# Altium PCB F407.PcbDoc (part 7 of 12)
Units mil, origin at the board's own origin, x right, y up, seen from the top; angles counter-clockwise.
Board outline 6062.25 x 4305.79 mil, 2 copper layers (Top Layer, Bottom Layer); 68 components, 138 nets, 423 pads, 108 vias.
Unrouted connection lines stored in the file: 2.
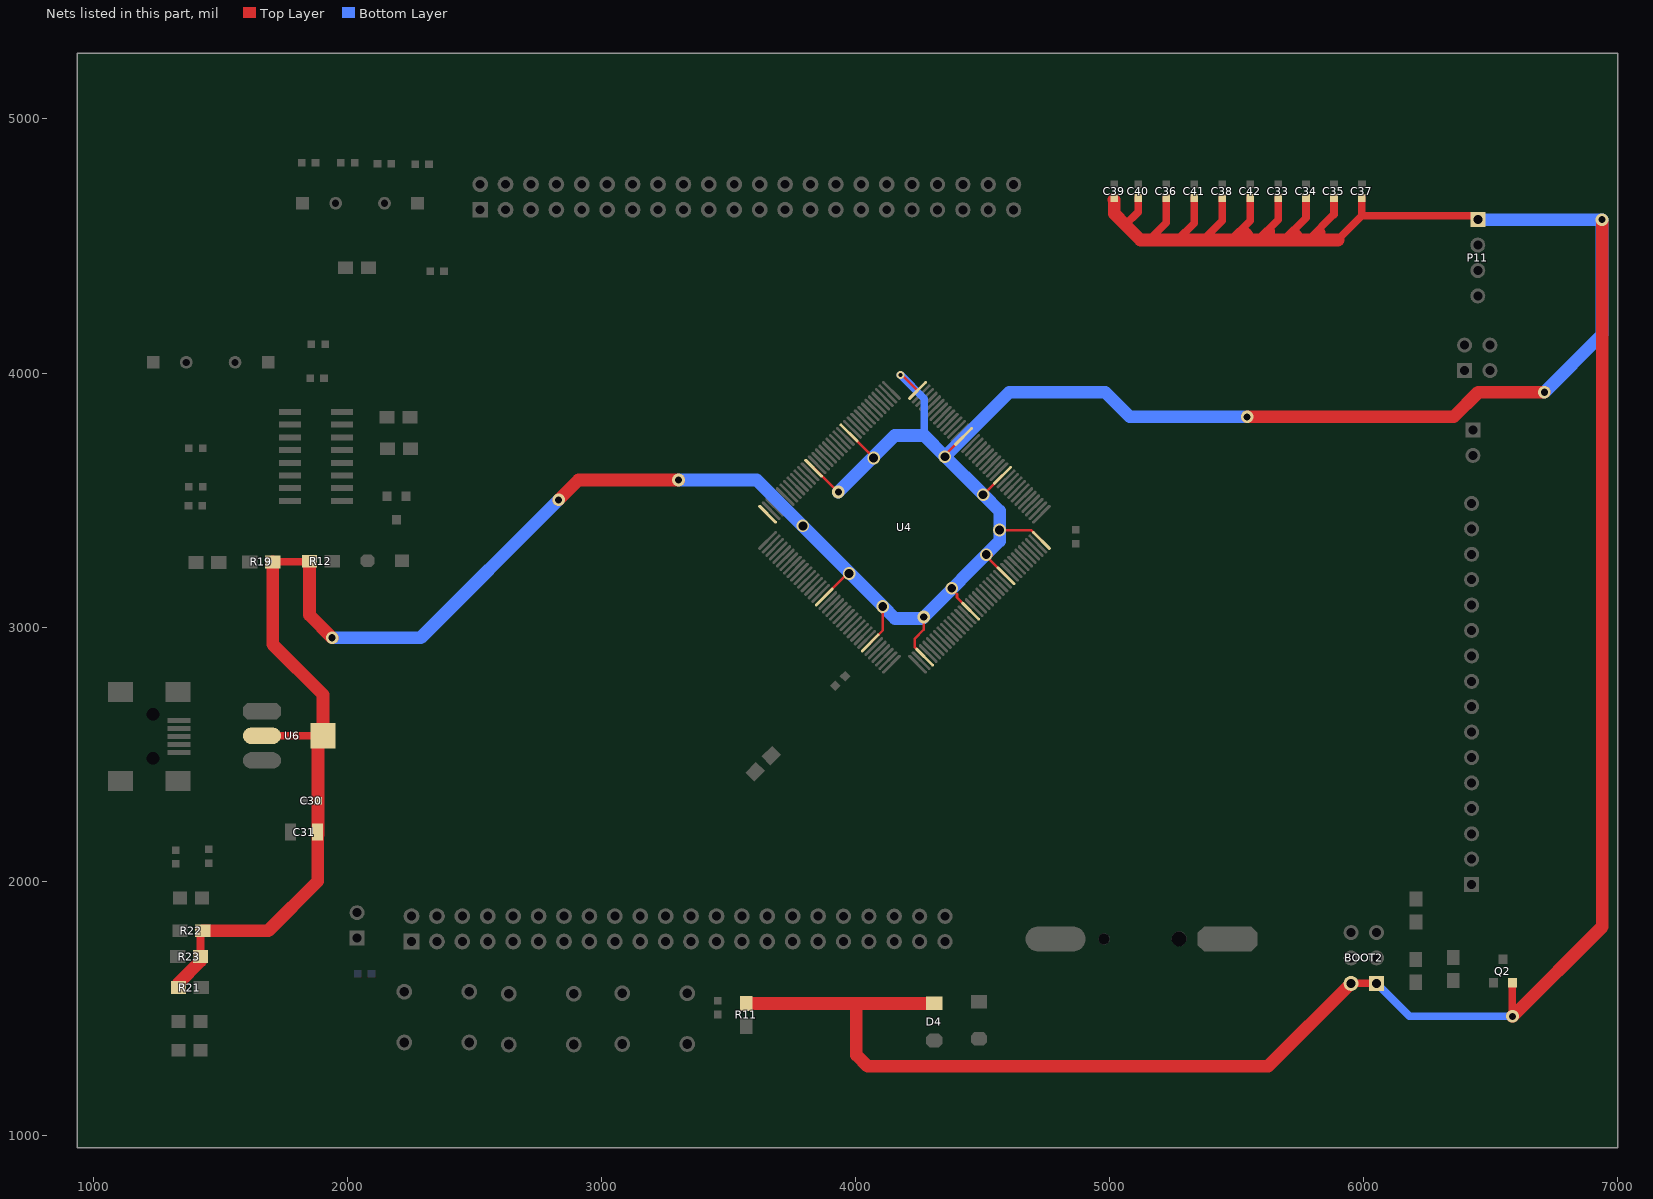
[diagram p7: the nets of this part, all layers, seen from the top]

## Via types
v1: diameter 30, hole 15, Top Layer to Bottom Layer, 48 vias
v2: diameter 50, hole 28, Top Layer to Bottom Layer, 42 vias
v3: diameter 50, hole 35, Top Layer to Bottom Layer, 9 vias
v4: diameter 20, hole 10, Top Layer to Bottom Layer, 8 vias
v5: diameter 50, hole 30, Top Layer to Bottom Layer, 1 vias

## Nets (pads, with @x,y where several pads share a name; then routed paths per layer and width w, separated by ;. In a path a pad name is that pad's centre, name@x,y a point inside that pad or via, vN(x,y) a via of type N, cw(c..) or ccw(c..) an arc to the next point about the centre after c; other vN are vias at no path point) (continued)
VCC3.3: (continued)
  Top Layer w30: 5524.47,4551.79 cw(c5502.27,4529.59) 5533.19,4524.18 ; 5524.47,4551.79 cw(c5502.27,4529.59) 5533.19,4524.18 ; 5524.47,4551.79 cw(c5502.27,4529.59) 5533.19,4524.18 ; 5524.47,4551.79 cw(c5502.27,4529.59) 5533.19,4524.18 ; 5524.47,4551.79 cw(c5502.27,4529.59) 5533.19,4524.18 ; 5524.47,4551.79 cw(c5502.27,4529.59) 5533.19,4524.18 ; 5524.47,4551.79 cw(c5502.27,4529.59) 5533.19,4524.18 ; 5524.47,4551.79 cw(c5502.27,4529.59) 5533.19,4524.18 ; 5524.47,4551.79 cw(c5502.27,4529.59) 5533.19,4524.18 ; 5524.47,4551.79 cw(c5502.27,4529.59) 5533.19,4524.18 ; 5524.47,4551.79 cw(c5502.27,4529.59) 5533.19,4524.18 ; 5524.47,4551.79 cw(c5502.27,4529.59) 5533.19,4524.18 ; 5524.47,4551.79 cw(c5502.27,4529.59) 5533.19,4524.18 ; 5524.47,4551.79 cw(c5502.27,4529.59) 5533.19,4524.18 ; 5524.47,4551.79 cw(c5502.27,4529.59) 5533.19,4524.18 ; 5524.47,4551.79 cw(c5502.27,4529.59) 5533.19,4524.18 ; 5524.47,4551.79 cw(c5502.27,4529.59) 5533.19,4524.18 ; 5524.47,4551.79 cw(c5502.27,4529.59) 5533.19,4524.18 ; 5524.47,4551.79 cw(c5502.27,4529.59) 5533.19,4524.18 ; 5524.47,4551.79 cw(c5502.27,4529.59) 5533.19,4524.18 ; 5524.47,4551.79 cw(c5502.27,4529.59) 5533.19,4524.18 ; 5524.47,4551.79 cw(c5502.27,4529.59) 5533.19,4524.18 ; 5524.47,4551.79 cw(c5502.27,4529.59) 5533.19,4524.18 ; 5524.47,4551.79 cw(c5502.27,4529.59) 5533.19,4524.18 ; 5524.47,4551.79 cw(c5502.27,4529.59) 5533.19,4524.18 ; 5524.47,4551.79 cw(c5502.27,4529.59) 5533.19,4524.18 ; 5524.47,4551.79 cw(c5502.27,4529.59) 5533.19,4524.18 ; 5524.47,4551.79 cw(c5502.27,4529.59) 5533.19,4524.18 ; 5524.47,4551.79 cw(c5502.27,4529.59) 5533.19,4524.18 ; 5524.47,4551.79 cw(c5502.27,4529.59) 5533.19,4524.18 ; 5524.47,4551.79 cw(c5502.27,4529.59) 5533.19,4524.18 ; 5524.47,4551.79 cw(c5502.27,4529.59) 5533.19,4524.18 ; 5524.47,4551.79 cw(c5502.27,4529.59) 5533.19,4524.18 ; 5524.47,4551.79 cw(c5502.27,4529.59) 5533.19,4524.18 ; 5524.47,4551.79 cw(c5502.27,4529.59) 5533.19,4524.18 ; 5524.47,4551.79 cw(c5502.27,4529.59) 5533.19,4524.18 ; 5524.47,4551.79 cw(c5502.27,4529.59) 5533.19,4524.18 ; 5524.47,4551.79 cw(c5502.27,4529.59) 5533.19,4524.18 ; 5524.47,4551.79 cw(c5502.27,4529.59) 5533.19,4524.18 ; 5524.47,4551.79 cw(c5502.27,4529.59) 5533.19,4524.18 ; 5524.47,4551.79 cw(c5502.27,4529.59) 5533.19,4524.18 ; 5524.47,4551.79 cw(c5502.27,4529.59) 5533.19,4524.18 ; 5524.47,4551.79 cw(c5502.27,4529.59) 5533.19,4524.18 ; 5524.47,4551.79 cw(c5502.27,4529.59) 5533.19,4524.18 ; 5524.47,4551.79 cw(c5502.27,4529.59) 5533.19,4524.18 ; 5524.47,4551.79 cw(c5502.27,4529.59) 5533.19,4524.18 ; 5524.47,4551.79 cw(c5502.27,4529.59) 5533.19,4524.18 ; 5524.47,4551.79 cw(c5502.27,4529.59) 5533.19,4524.18 ; 5524.47,4551.79 cw(c5502.27,4529.59) 5533.19,4524.18 ; 5524.47,4551.79 cw(c5502.27,4529.59) 5533.19,4524.18 ; 5524.47,4551.79 cw(c5502.27,4529.59) 5533.19,4524.18 ; 5524.47,4551.79 cw(c5502.27,4529.59) 5533.19,4524.18 ; 5524.47,4551.79 cw(c5502.27,4529.59) 5533.19,4524.18 ; 5524.47,4551.79 cw(c5502.27,4529.59) 5533.19,4524.18 ; 5524.47,4551.79 cw(c5502.27,4529.59) 5533.19,4524.18 ; 5524.47,4551.79 cw(c5502.27,4529.59) 5533.19,4524.18 ; 5524.47,4551.79 cw(c5502.27,4529.59) 5533.19,4524.18 ; 5524.47,4551.79 cw(c5502.27,4529.59) 5533.19,4524.18 ; 5524.47,4551.79 cw(c5502.27,4529.59) 5533.19,4524.18 ; 5524.47,4551.79 cw(c5502.27,4529.59) 5533.19,4524.18 ; 5524.47,4551.79 cw(c5502.27,4529.59) 5533.19,4524.18 ; 5524.47,4551.79 cw(c5502.27,4529.59) 5533.19,4524.18 ; 5524.47,4551.79 cw(c5502.27,4529.59) 5533.19,4524.18 ; 5524.47,4551.79 cw(c5502.27,4529.59) 5533.19,4524.18 ; 5524.47,4551.79 cw(c5502.27,4529.59) 5533.19,4524.18 ; 5524.47,4551.79 cw(c5502.27,4529.59) 5533.19,4524.18 ; 5524.47,4551.79 cw(c5502.27,4529.59) 5533.19,4524.18 ; 5524.47,4551.79 cw(c5502.27,4529.59) 5533.19,4524.18 ; 5524.47,4551.79 cw(c5502.27,4529.59) 5533.19,4524.18 ; 5524.47,4551.79 cw(c5502.27,4529.59) 5533.19,4524.18 ; 5524.47,4551.79 cw(c5502.27,4529.59) 5533.19,4524.18 ; 5524.47,4551.79 cw(c5502.27,4529.59) 5533.19,4524.18 ; 5524.47,4551.79 cw(c5502.27,4529.59) 5533.19,4524.18 ; 5524.47,4551.79 cw(c5502.27,4529.59) 5533.19,4524.18 ; 5524.47,4551.79 cw(c5502.27,4529.59) 5533.19,4524.18 ; 5524.47,4551.79 cw(c5502.27,4529.59) 5533.19,4524.18 ; 5524.47,4551.79 cw(c5502.27,4529.59) 5533.19,4524.18 ; 5524.47,4551.79 cw(c5502.27,4529.59) 5533.19,4524.18 ; 5524.47,4551.79 cw(c5502.27,4529.59) 5533.19,4524.18 ; 5524.47,4551.79 cw(c5502.27,4529.59) 5533.19,4524.18 ; 5524.47,4551.79 cw(c5502.27,4529.59) 5533.19,4524.18 ; 5524.47,4551.79 cw(c5502.27,4529.59) 5533.19,4524.18 ; 5524.47,4551.79 cw(c5502.27,4529.59) 5533.19,4524.18 ; 5524.47,4551.79 cw(c5502.27,4529.59) 5533.19,4524.18 ; 5524.47,4551.79 cw(c5502.27,4529.59) 5533.19,4524.18 ; 5524.47,4551.79 cw(c5502.27,4529.59) 5533.19,4524.18 ; 5524.47,4551.79 cw(c5502.27,4529.59) 5533.19,4524.18 ; 5524.47,4551.79 cw(c5502.27,4529.59) 5533.19,4524.18 ; 5524.47,4551.79 cw(c5502.27,4529.59) 5533.19,4524.18 ; 5524.47,4551.79 cw(c5502.27,4529.59) 5533.19,4524.18 ; 5524.47,4551.79 cw(c5502.27,4529.59) 5533.19,4524.18 ; 5524.47,4551.79 cw(c5502.27,4529.59) 5533.19,4524.18 ; 5524.47,4551.79 cw(c5502.27,4529.59) 5533.19,4524.18 ; 5524.47,4551.79 cw(c5502.27,4529.59) 5533.19,4524.18 ; 5524.47,4551.79 cw(c5502.27,4529.59) 5533.19,4524.18 ; 5524.47,4551.79 cw(c5502.27,4529.59) 5533.19,4524.18 ; 5524.47,4551.79 cw(c5502.27,4529.59) 5533.19,4524.18 ; 5524.47,4551.79 cw(c5502.27,4529.59) 5533.19,4524.18 ; 5524.47,4551.79 cw(c5502.27,4529.59) 5533.19,4524.18 ; 5524.47,4551.79 cw(c5502.27,4529.59) 5533.19,4524.18 ; 5524.47,4551.79 cw(c5502.27,4529.59) 5533.19,4524.18 ; 5524.47,4551.79 cw(c5502.27,4529.59) 5533.19,4524.18 ; 5524.47,4551.79 cw(c5502.27,4529.59) 5533.19,4524.18 ; 5524.47,4551.79 cw(c5502.27,4529.59) 5533.19,4524.18 ; 5524.47,4551.79 cw(c5502.27,4529.59) 5533.19,4524.18 ; 5524.47,4551.79 cw(c5502.27,4529.59) 5533.19,4524.18 ; 5524.47,4551.79 cw(c5502.27,4529.59) 5533.19,4524.18 ; 5524.47,4551.79 cw(c5502.27,4529.59) 5533.19,4524.18 ; 5524.47,4551.79 cw(c5502.27,4529.59) 5533.19,4524.18 ; 5524.47,4551.79 cw(c5502.27,4529.59) 5533.19,4524.18 ; 5524.47,4551.79 cw(c5502.27,4529.59) 5533.19,4524.18 ; 5524.47,4551.79 cw(c5502.27,4529.59) 5533.19,4524.18 ; 5524.47,4551.79 cw(c5502.27,4529.59) 5533.19,4524.18 ; 5524.47,4551.79 cw(c5502.27,4529.59) 5533.19,4524.18 ; 5524.47,4551.79 cw(c5502.27,4529.59) 5533.19,4524.18 ; 5524.47,4551.79 cw(c5502.27,4529.59) 5533.19,4524.18 ; 5524.47,4551.79 cw(c5502.27,4529.59) 5533.19,4524.18 ; 5524.47,4551.79 cw(c5502.27,4529.59) 5533.19,4524.18 ; 5524.47,4551.79 cw(c5502.27,4529.59) 5533.19,4524.18 ; 5524.47,4551.79 cw(c5502.27,4529.59) 5533.19,4524.18 ; 5524.47,4551.79 cw(c5502.27,4529.59) 5533.19,4524.18 ; 5524.47,4551.79 cw(c5502.27,4529.59) 5533.19,4524.18 ; 5524.47,4551.79 cw(c5502.27,4529.59) 5533.19,4524.18 ; 5524.47,4551.79 cw(c5502.27,4529.59) 5533.19,4524.18 ; 5524.47,4551.79 cw(c5502.27,4529.59) 5533.19,4524.18 ; 5524.47,4551.79 cw(c5502.27,4529.59) 5533.19,4524.18 ; 5524.47,4551.79 cw(c5502.27,4529.59) 5533.19,4524.18 ; 5524.47,4551.79 cw(c5502.27,4529.59) 5533.19,4524.18 ; 5524.47,4551.79 cw(c5502.27,4529.59) 5533.19,4524.18 ; 5524.47,4551.79 cw(c5502.27,4529.59) 5533.19,4524.18 ; 5524.47,4551.79 cw(c5502.27,4529.59) 5533.19,4524.18 ; 5524.47,4551.79 cw(c5502.27,4529.59) 5533.19,4524.18 ; 5524.47,4551.79 cw(c5502.27,4529.59) 5533.19,4524.18 ; 5524.47,4551.79 cw(c5502.27,4529.59) 5533.19,4524.18 ; 5524.47,4551.79 cw(c5502.27,4529.59) 5533.19,4524.18 ; 5524.47,4551.79 cw(c5502.27,4529.59) 5533.19,4524.18 ; 5524.47,4551.79 cw(c5502.27,4529.59) 5533.19,4524.18 ; 5524.47,4551.79 cw(c5502.27,4529.59) 5533.19,4524.18 ; 5524.47,4551.79 cw(c5502.27,4529.59) 5533.19,4524.18 ; 5524.47,4551.79 cw(c5502.27,4529.59) 5533.19,4524.18 ; 5524.47,4551.79 cw(c5502.27,4529.59) 5533.19,4524.18 ; 5524.47,4551.79 cw(c5502.27,4529.59) 5533.19,4524.18 ; 5524.47,4551.79 cw(c5502.27,4529.59) 5533.19,4524.18 ; 5524.47,4551.79 cw(c5502.27,4529.59) 5533.19,4524.18 ; 5524.47,4551.79 cw(c5502.27,4529.59) 5533.19,4524.18 ; 5524.47,4551.79 cw(c5502.27,4529.59) 5533.19,4524.18 ; 5524.47,4551.79 cw(c5502.27,4529.59) 5533.19,4524.18 ; 5524.47,4551.79 cw(c5502.27,4529.59) 5533.19,4524.18 ; 5524.47,4551.79 cw(c5502.27,4529.59) 5533.19,4524.18 ; 5524.47,4551.79 cw(c5502.27,4529.59) 5533.19,4524.18 ; 5524.47,4551.79 cw(c5502.27,4529.59) 5533.19,4524.18 ; 5524.47,4551.79 cw(c5502.27,4529.59) 5533.19,4524.18 ; 5524.47,4551.79 cw(c5502.27,4529.59) 5533.19,4524.18 ; 5524.47,4551.79 cw(c5502.27,4529.59) 5533.19,4524.18 ; 5524.47,4551.79 cw(c5502.27,4529.59) 5533.19,4524.18 ; 5524.47,4551.79 cw(c5502.27,4529.59) 5533.19,4524.18 ; 5524.47,4551.79 cw(c5502.27,4529.59) 5533.19,4524.18 ; 5524.47,4551.79 cw(c5502.27,4529.59) 5533.19,4524.18 ; 5524.47,4551.79 cw(c5502.27,4529.59) 5533.19,4524.18 ; 5524.47,4551.79 cw(c5502.27,4529.59) 5533.19,4524.18 ; 5524.47,4551.79 cw(c5502.27,4529.59) 5533.19,4524.18 ; 5524.47,4551.79 cw(c5502.27,4529.59) 5533.19,4524.18 ; 5524.47,4551.79 cw(c5502.27,4529.59) 5533.19,4524.18 ; 5524.47,4551.79 cw(c5502.27,4529.59) 5533.19,4524.18 ; 5524.47,4551.79 cw(c5502.27,4529.59) 5533.19,4524.18 ; 5524.47,4551.79 cw(c5502.27,4529.59) 5533.19,4524.18 ; 5524.47,4551.79 cw(c5502.27,4529.59) 5533.19,4524.18 ; 5524.47,4551.79 cw(c5502.27,4529.59) 5533.19,4524.18 ; 5524.47,4551.79 cw(c5502.27,4529.59) 5533.19,4524.18 ; 5524.47,4551.79 cw(c5502.27,4529.59) 5533.19,4524.18 ; 5524.47,4551.79 cw(c5502.27,4529.59) 5533.19,4524.18 ; 5524.47,4551.79 cw(c5502.27,4529.59) 5533.19,4524.18 ; 5524.47,4551.79 cw(c5502.27,4529.59) 5533.19,4524.18 ; 5524.47,4551.79 cw(c5502.27,4529.59) 5533.19,4524.18 ; 5524.47,4551.79 cw(c5502.27,4529.59) 5533.19,4524.18 ; 5524.47,4551.79 cw(c5502.27,4529.59) 5533.19,4524.18 ; 5524.47,4551.79 cw(c5502.27,4529.59) 5533.19,4524.18 ; 5524.47,4551.79 cw(c5502.27,4529.59) 5533.19,4524.18 ; 5524.47,4551.79 cw(c5502.27,4529.59) 5533.19,4524.18 ; 5524.47,4551.79 cw(c5502.27,4529.59) 5533.19,4524.18 ; 5524.47,4551.79 cw(c5502.27,4529.59) 5533.19,4524.18 ; 5524.47,4551.79 cw(c5502.27,4529.59) 5533.19,4524.18 ; 5524.47,4551.79 cw(c5502.27,4529.59) 5533.19,4524.18 ; 5524.47,4551.79 cw(c5502.27,4529.59) 5533.19,4524.18 ; 5524.47,4551.79 cw(c5502.27,4529.59) 5533.19,4524.18 ; 5524.47,4551.79 cw(c5502.27,4529.59) 5533.19,4524.18 ; 5524.47,4551.79 cw(c5502.27,4529.59) 5533.19,4524.18 ; 5524.47,4551.79 cw(c5502.27,4529.59) 5533.19,4524.18 ; 5524.47,4551.79 cw(c5502.27,4529.59) 5533.19,4524.18 ; 5524.47,4551.79 cw(c5502.27,4529.59) 5533.19,4524.18 ; 5524.47,4551.79 cw(c5502.27,4529.59) 5533.19,4524.18 ; 5524.47,4551.79 cw(c5502.27,4529.59) 5533.19,4524.18 ; 5524.47,4551.79 cw(c5502.27,4529.59) 5533.19,4524.18 ; 5524.47,4551.79 cw(c5502.27,4529.59) 5533.19,4524.18 ; 5524.47,4551.79 cw(c5502.27,4529.59) 5533.19,4524.18 ; 5524.47,4551.79 cw(c5502.27,4529.59) 5533.19,4524.18 ; 5524.47,4551.79 cw(c5502.27,4529.59) 5533.19,4524.18 ; 5524.47,4551.79 cw(c5502.27,4529.59) 5533.19,4524.18 ; 5524.47,4551.79 cw(c5502.27,4529.59) 5533.19,4524.18 ; 5524.47,4551.79 cw(c5502.27,4529.59) 5533.19,4524.18 ; 5524.47,4551.79 cw(c5502.27,4529.59) 5533.19,4524.18 ; 5524.47,4551.79 cw(c5502.27,4529.59) 5533.19,4524.18 ; 5524.47,4551.79 cw(c5502.27,4529.59) 5533.19,4524.18 ; 5524.47,4551.79 cw(c5502.27,4529.59) 5533.19,4524.18 ; 5524.47,4551.79 cw(c5502.27,4529.59) 5533.19,4524.18 ; 5524.47,4551.79 cw(c5502.27,4529.59) 5533.19,4524.18 ; 5524.47,4551.79 cw(c5502.27,4529.59) 5533.19,4524.18 ; 5524.47,4551.79 cw(c5502.27,4529.59) 5533.19,4524.18 ; 5524.47,4551.79 cw(c5502.27,4529.59) 5533.19,4524.18 ; 5524.47,4551.79 cw(c5502.27,4529.59) 5533.19,4524.18 ; 5524.47,4551.79 cw(c5502.27,4529.59) 5533.19,4524.18 ; 5524.47,4551.79 cw(c5502.27,4529.59) 5533.19,4524.18 ; 5524.47,4551.79 cw(c5502.27,4529.59) 5533.19,4524.18 ; 5524.47,4551.79 cw(c5502.27,4529.59) 5533.19,4524.18 ; 5524.47,4551.79 cw(c5502.27,4529.59) 5533.19,4524.18 ; 5524.47,4551.79 cw(c5502.27,4529.59) 5533.19,4524.18 ; 5524.47,4551.79 cw(c5502.27,4529.59) 5533.19,4524.18 ; 5524.47,4551.79 cw(c5502.27,4529.59) 5533.19,4524.18 ; 5524.47,4551.79 cw(c5502.27,4529.59) 5533.19,4524.18 ; 5524.47,4551.79 cw(c5502.27,4529.59) 5533.19,4524.18 ; 5524.47,4551.79 cw(c5502.27,4529.59) 5533.19,4524.18 ; 5524.47,4551.79 cw(c5502.27,4529.59) 5533.19,4524.18 ; 5524.47,4551.79 cw(c5502.27,4529.59) 5533.19,4524.18 ; 5524.47,4551.79 cw(c5502.27,4529.59) 5533.19,4524.18 ; 5524.47,4551.79 cw(c5502.27,4529.59) 5533.19,4524.18 ; 5524.47,4551.79 cw(c5502.27,4529.59) 5533.19,4524.18 ; 5524.47,4551.79 cw(c5502.27,4529.59) 5533.19,4524.18 ; 5524.47,4551.79 cw(c5502.27,4529.59) 5533.19,4524.18 ; 5524.47,4551.79 cw(c5502.27,4529.59) 5533.19,4524.18 ; 5524.47,4551.79 cw(c5502.27,4529.59) 5533.19,4524.18 ; 5524.47,4551.79 cw(c5502.27,4529.59) 5533.19,4524.18 ; 5524.47,4551.79 cw(c5502.27,4529.59) 5533.19,4524.18 ; 5524.47,4551.79 cw(c5502.27,4529.59) 5533.19,4524.18 ; 5524.47,4551.79 cw(c5502.27,4529.59) 5533.19,4524.18 ; 5524.47,4551.79 cw(c5502.27,4529.59) 5533.19,4524.18 ; 5524.47,4551.79 cw(c5502.27,4529.59) 5533.19,4524.18 ; 5524.47,4551.79 cw(c5502.27,4529.59) 5533.19,4524.18 ; 5524.47,4551.79 cw(c5502.27,4529.59) 5533.19,4524.18 ; 5524.47,4551.79 cw(c5502.27,4529.59) 5533.19,4524.18 ; 5524.47,4551.79 cw(c5502.27,4529.59) 5533.19,4524.18 ; 5524.47,4551.79 cw(c5502.27,4529.59) 5533.19,4524.18 ; 5524.47,4551.79 cw(c5502.27,4529.59) 5533.19,4524.18 ; 5524.47,4551.79 cw(c5502.27,4529.59) 5533.19,4524.18 ; 5524.47,4551.79 cw(c5502.27,4529.59) 5533.19,4524.18 ; 5524.47,4551.79 cw(c5502.27,4529.59) 5533.19,4524.18 ; 5524.47,4551.79 cw(c5502.27,4529.59) 5533.19,4524.18 ; 5524.47,4551.79 cw(c5502.27,4529.59) 5533.19,4524.18 ; 5524.47,4551.79 cw(c5502.27,4529.59) 5533.19,4524.18 ; 5524.47,4551.79 cw(c5502.27,4529.59) 5533.19,4524.18 ; 5524.47,4551.79 cw(c5502.27,4529.59) 5533.19,4524.18 ; 5524.47,4551.79 cw(c5502.27,4529.59) 5533.19,4524.18 ; 5524.47,4551.79 cw(c5502.27,4529.59) 5533.19,4524.18 ; 5524.47,4551.79 cw(c5502.27,4529.59) 5533.19,4524.18 ; 5524.47,4551.79 cw(c5502.27,4529.59) 5533.19,4524.18 ; 5524.47,4551.79 cw(c5502.27,4529.59) 5533.19,4524.18 ; 5524.47,4551.79 cw(c5502.27,4529.59) 5533.19,4524.18 ; 5524.47,4551.79 cw(c5502.27,4529.59) 5533.19,4524.18 ; 5524.47,4551.79 cw(c5502.27,4529.59) 5533.19,4524.18 ; 5524.47,4551.79 cw(c5502.27,4529.59) 5533.19,4524.18 ; 5524.47,4551.79 cw(c5502.27,4529.59) 5533.19,4524.18 ; 5524.47,4551.79 cw(c5502.27,4529.59) 5533.19,4524.18 ; 5524.47,4551.79 cw(c5502.27,4529.59) 5533.19,4524.18 ; 5524.47,4551.79 cw(c5502.27,4529.59) 5533.19,4524.18 ; 5524.47,4551.79 cw(c5502.27,4529.59) 5533.19,4524.18 ; 5524.47,4551.79 cw(c5502.27,4529.59) 5533.19,4524.18 ; 5524.47,4551.79 cw(c5502.27,4529.59) 5533.19,4524.18 ; 5524.47,4551.79 cw(c5502.27,4529.59) 5533.19,4524.18 ; 5524.47,4551.79 cw(c5502.27,4529.59) 5533.19,4524.18 ; 5524.47,4551.79 cw(c5502.27,4529.59) 5533.19,4524.18 ; 5524.47,4551.79 cw(c5502.27,4529.59) 5533.19,4524.18 ; 5524.47,4551.79 cw(c5502.27,4529.59) 5533.19,4524.18 ; 5524.47,4551.79 cw(c5502.27,4529.59) 5533.19,4524.18 ; 5524.47,4551.79 cw(c5502.27,4529.59) 5533.19,4524.18 ; 5524.47,4551.79 cw(c5502.27,4529.59) 5533.19,4524.18 ; 5524.47,4551.79 cw(c5502.27,4529.59) 5533.19,4524.18 ; 5524.47,4551.79 cw(c5502.27,4529.59) 5533.19,4524.18 ; 5524.47,4551.79 cw(c5502.27,4529.59) 5533.19,4524.18 ; 5524.47,4551.79 cw(c5502.27,4529.59) 5533.19,4524.18 ; 5524.47,4551.79 cw(c5502.27,4529.59) 5533.19,4524.18 ; 5524.47,4551.79 cw(c5502.27,4529.59) 5533.19,4524.18 ; 5524.47,4551.79 cw(c5502.27,4529.59) 5533.19,4524.18 ; 5524.47,4551.79 cw(c5502.27,4529.59) 5533.19,4524.18 ; 5524.47,4551.79 cw(c5502.27,4529.59) 5533.19,4524.18 ; 5524.47,4551.79 cw(c5502.27,4529.59) 5533.19,4524.18 ; 5524.47,4551.79 cw(c5502.27,4529.59) 5533.19,4524.18 ; 5524.47,4551.79 cw(c5502.27,4529.59) 5533.19,4524.18 ; 5524.47,4551.79 cw(c5502.27,4529.59) 5533.19,4524.18 ; 5524.47,4551.79 cw(c5502.27,4529.59) 5533.19,4524.18 ; 5524.47,4551.79 cw(c5502.27,4529.59) 5533.19,4524.18 ; 5524.47,4551.79 cw(c5502.27,4529.59) 5533.19,4524.18 ; 5524.47,4551.79 cw(c5502.27,4529.59) 5533.19,4524.18 ; 5524.47,4551.79 cw(c5502.27,4529.59) 5533.19,4524.18 ; 5524.47,4551.79 cw(c5502.27,4529.59) 5533.19,4524.18 ; 5524.47,4551.79 cw(c5502.27,4529.59) 5533.19,4524.18 ; 5524.47,4551.79 cw(c5502.27,4529.59) 5533.19,4524.18 ; 5524.47,4551.79 cw(c5502.27,4529.59) 5533.19,4524.18 ; 5524.47,4551.79 cw(c5502.27,4529.59) 5533.19,4524.18 ; 5524.47,4551.79 cw(c5502.27,4529.59) 5533.19,4524.18 ; 5524.47,4551.79 cw(c5502.27,4529.59) 5533.19,4524.18 ; 5524.47,4551.79 cw(c5502.27,4529.59) 5533.19,4524.18 ; 5524.47,4551.79 cw(c5502.27,4529.59) 5533.19,4524.18 ; 5524.47,4551.79 cw(c5502.27,4529.59) 5533.19,4524.18 ; 5524.47,4551.79 cw(c5502.27,4529.59) 5533.19,4524.18 ; 5524.47,4551.79 cw(c5502.27,4529.59) 5533.19,4524.18 ; 5524.47,4551.79 cw(c5502.27,4529.59) 5533.19,4524.18 ; 5524.47,4551.79 cw(c5502.27,4529.59) 5533.19,4524.18 ; 5524.47,4551.79 cw(c5502.27,4529.59) 5533.19,4524.18 ; 5524.47,4551.79 cw(c5502.27,4529.59) 5533.19,4524.18 ; 5524.47,4551.79 cw(c5502.27,4529.59) 5533.19,4524.18 ; 5524.47,4551.79 cw(c5502.27,4529.59) 5533.19,4524.18 ; 5524.47,4551.79 cw(c5502.27,4529.59) 5533.19,4524.18 ; 5524.47,4551.79 cw(c5502.27,4529.59) 5533.19,4524.18 ; 5524.47,4551.79 cw(c5502.27,4529.59) 5533.19,4524.18 ; 5524.47,4551.79 cw(c5502.27,4529.59) 5533.19,4524.18 ; 5524.47,4551.79 cw(c5502.27,4529.59) 5533.19,4524.18 ; 5524.47,4551.79 cw(c5502.27,4529.59) 5533.19,4524.18 ; 5524.47,4551.79 cw(c5502.27,4529.59) 5533.19,4524.18 ; 5524.47,4551.79 cw(c5502.27,4529.59) 5533.19,4524.18 ; 5524.47,4551.79 cw(c5502.27,4529.59) 5533.19,4524.18 ; 5524.47,4551.79 cw(c5502.27,4529.59) 5533.19,4524.18 ; 5524.47,4551.79 cw(c5502.27,4529.59) 5533.19,4524.18 ; 5524.47,4551.79 cw(c5502.27,4529.59) 5533.19,4524.18 ; 5524.47,4551.79 cw(c5502.27,4529.59) 5533.19,4524.18 ; 5524.47,4551.79 cw(c5502.27,4529.59) 5533.19,4524.18 ; 5524.47,4551.79 cw(c5502.27,4529.59) 5533.19,4524.18 ; 5524.47,4551.79 cw(c5502.27,4529.59) 5533.19,4524.18 ; 5524.47,4551.79 cw(c5502.27,4529.59) 5533.19,4524.18 ; 5524.47,4551.79 cw(c5502.27,4529.59) 5533.19,4524.18 ; 5524.47,4551.79 cw(c5502.27,4529.59) 5533.19,4524.18 ; 5524.47,4551.79 cw(c5502.27,4529.59) 5533.19,4524.18 ; 5524.47,4551.79 cw(c5502.27,4529.59) 5533.19,4524.18 ; 5524.47,4551.79 cw(c5502.27,4529.59) 5533.19,4524.18 ; 5524.47,4551.79 cw(c5502.27,4529.59) 5533.19,4524.18 ; 5524.47,4551.79 cw(c5502.27,4529.59) 5533.19,4524.18 ; 5524.47,4551.79 cw(c5502.27,4529.59) 5533.19,4524.18 ; 5524.47,4551.79 cw(c5502.27,4529.59) 5533.19,4524.18 ; 5524.47,4551.79 cw(c5502.27,4529.59) 5533.19,4524.18 ; 5524.47,4551.79 cw(c5502.27,4529.59) 5533.19,4524.18 ; 5524.47,4551.79 cw(c5502.27,4529.59) 5533.19,4524.18 ; 5524.47,4551.79 cw(c5502.27,4529.59) 5533.19,4524.18 ; 5524.47,4551.79 cw(c5502.27,4529.59) 5533.19,4524.18 ; 5524.47,4551.79 cw(c5502.27,4529.59) 5533.19,4524.18 ; 5524.47,4551.79 cw(c5502.27,4529.59) 5533.19,4524.18 ; 5524.47,4551.79 cw(c5502.27,4529.59) 5533.19,4524.18 ; 5524.47,4551.79 cw(c5502.27,4529.59) 5533.19,4524.18 ; 5524.47,4551.79 cw(c5502.27,4529.59) 5533.19,4524.18 ; 5524.47,4551.79 cw(c5502.27,4529.59) 5533.19,4524.18 ; 5524.47,4551.79 cw(c5502.27,4529.59) 5533.19,4524.18 ; 5524.47,4551.79 cw(c5502.27,4529.59) 5533.19,4524.18 ; 5524.47,4551.79 cw(c5502.27,4529.59) 5533.19,4524.18 ; 5524.47,4551.79 cw(c5502.27,4529.59) 5533.19,4524.18 ; 5524.47,4551.79 cw(c5502.27,4529.59) 5533.19,4524.18 ; 5524.47,4551.79 cw(c5502.27,4529.59) 5533.19,4524.18 ; 5524.47,4551.79 cw(c5502.27,4529.59) 5533.19,4524.18 ; 5524.47,4551.79 cw(c5502.27,4529.59) 5533.19,4524.18 ; 5524.47,4551.79 cw(c5502.27,4529.59) 5533.19,4524.18 ; 5524.47,4551.79 cw(c5502.27,4529.59) 5533.19,4524.18 ; 5524.47,4551.79 cw(c5502.27,4529.59) 5533.19,4524.18 ; 5524.47,4551.79 cw(c5502.27,4529.59) 5533.19,4524.18 ; 5524.47,4551.79 cw(c5502.27,4529.59) 5533.19,4524.18 ; 5524.47,4551.79 cw(c5502.27,4529.59) 5533.19,4524.18 ; 5524.47,4551.79 cw(c5502.27,4529.59) 5533.19,4524.18 ; 5524.47,4551.79 cw(c5502.27,4529.59) 5533.19,4524.18 ; 5524.47,4551.79 cw(c5502.27,4529.59) 5533.19,4524.18 ; 5524.47,4551.79 cw(c5502.27,4529.59) 5533.19,4524.18 ; 5524.47,4551.79 cw(c5502.27,4529.59) 5533.19,4524.18 ; 5524.47,4551.79 cw(c5502.27,4529.59) 5533.19,4524.18 ; 5524.47,4551.79 cw(c5502.27,4529.59) 5533.19,4524.18 ; 5524.47,4551.79 cw(c5502.27,4529.59) 5533.19,4524.18 ; 5524.47,4551.79 cw(c5502.27,4529.59) 5533.19,4524.18 ; 5524.47,4551.79 cw(c5502.27,4529.59) 5533.19,4524.18 ; 5524.47,4551.79 cw(c5502.27,4529.59) 5533.19,4524.18 ; 5524.47,4551.79 cw(c5502.27,4529.59) 5533.19,4524.18 ; 5524.47,4551.79 cw(c5502.27,4529.59) 5533.19,4524.18 ; 5524.47,4551.79 cw(c5502.27,4529.59) 5533.19,4524.18 ; 5524.47,4551.79 cw(c5502.27,4529.59) 5533.19,4524.18 ; 5524.47,4551.79 cw(c5502.27,4529.59) 5533.19,4524.18 ; 5524.47,4551.79 cw(c5502.27,4529.59) 5533.19,4524.18 ; 5524.47,4551.79 cw(c5502.27,4529.59) 5533.19,4524.18 ; 5524.47,4551.79 cw(c5502.27,4529.59) 5533.19,4524.18 ; 5524.47,4551.79 cw(c5502.27,4529.59) 5533.19,4524.18 ; 5524.47,4551.79 cw(c5502.27,4529.59) 5533.19,4524.18 ; 5524.47,4551.79 cw(c5502.27,4529.59) 5533.19,4524.18 ; 5524.47,4551.79 cw(c5502.27,4529.59) 5533.19,4524.18 ; 5524.47,4551.79 cw(c5502.27,4529.59) 5533.19,4524.18 ; 5524.47,4551.79 cw(c5502.27,4529.59) 5533.19,4524.18 ; 5524.47,4551.79 cw(c5502.27,4529.59) 5533.19,4524.18 ; 5524.47,4551.79 cw(c5502.27,4529.59) 5533.19,4524.18 ; 5524.47,4551.79 cw(c5502.27,4529.59) 5533.19,4524.18 ; 5524.47,4551.79 cw(c5502.27,4529.59) 5533.19,4524.18 ; 5524.47,4551.79 cw(c5502.27,4529.59) 5533.19,4524.18 ; 5524.47,4551.79 cw(c5502.27,4529.59) 5533.19,4524.18 ; 5524.47,4551.79 cw(c5502.27,4529.59) 5533.19,4524.18 ; 5524.47,4551.79 cw(c5502.27,4529.59) 5533.19,4524.18 ; 5524.47,4551.79 cw(c5502.27,4529.59) 5533.19,4524.18 ; 5524.47,4551.79 cw(c5502.27,4529.59) 5533.19,4524.18 ; 5524.47,4551.79 cw(c5502.27,4529.59) 5533.19,4524.18 ; 5524.47,4551.79 cw(c5502.27,4529.59) 5533.19,4524.18 ; 5524.47,4551.79 cw(c5502.27,4529.59) 5533.19,4524.18 ; 5524.47,4551.79 cw(c5502.27,4529.59) 5533.19,4524.18 ; 5524.47,4551.79 cw(c5502.27,4529.59) 5533.19,4524.18 ; 5524.47,4551.79 cw(c5502.27,4529.59) 5533.19,4524.18 ; 5524.47,4551.79 cw(c5502.27,4529.59) 5533.19,4524.18 ; 5524.47,4551.79 cw(c5502.27,4529.59) 5533.19,4524.18 ; 5524.47,4551.79 cw(c5502.27,4529.59) 5533.19,4524.18 ; 5524.47,4551.79 cw(c5502.27,4529.59) 5533.19,4524.18 ; 5524.47,4551.79 cw(c5502.27,4529.59) 5533.19,4524.18 ; 5524.47,4551.79 cw(c5502.27,4529.59) 5533.19,4524.18 ; 5524.47,4551.79 cw(c5502.27,4529.59) 5533.19,4524.18 ; 5524.47,4551.79 cw(c5502.27,4529.59) 5533.19,4524.18 ; 5524.47,4551.79 cw(c5502.27,4529.59) 5533.19,4524.18 ; 5524.47,4551.79 cw(c5502.27,4529.59) 5533.19,4524.18 ; 5524.47,4551.79 cw(c5502.27,4529.59) 5533.19,4524.18 ; 5524.47,4551.79 cw(c5502.27,4529.59) 5533.19,4524.18 ; 5524.47,4551.79 cw(c5502.27,4529.59) 5533.19,4524.18 ; 5524.47,4551.79 cw(c5502.27,4529.59) 5533.19,4524.18 ; 5524.47,4551.79 cw(c5502.27,4529.59) 5533.19,4524.18 ; 5524.47,4551.79 cw(c5502.27,4529.59) 5533.19,4524.18 ; 5524.47,4551.79 cw(c5502.27,4529.59) 5533.19,4524.18 ; 5524.47,4551.79 cw(c5502.27,4529.59) 5533.19,4524.18 ; 5524.47,4551.79 cw(c5502.27,4529.59) 5533.19,4524.18 ; 5524.47,4551.79 cw(c5502.27,4529.59) 5533.19,4524.18 ; 5524.47,4551.79 cw(c5502.27,4529.59) 5533.19,4524.18 ; 5524.47,4551.79 cw(c5502.27,4529.59) 5533.19,4524.18 ; 5524.47,4551.79 cw(c5502.27,4529.59) 5533.19,4524.18 ; 5524.47,4551.79 cw(c5502.27,4529.59) 5533.19,4524.18 ; 5524.47,4551.79 cw(c5502.27,4529.59) 5533.19,4524.18 ; 5524.47,4551.79 cw(c5502.27,4529.59) 5533.19,4524.18 ; 5524.47,4551.79 cw(c5502.27,4529.59) 5533.19,4524.18 ; 5524.47,4551.79 cw(c5502.27,4529.59) 5533.19,4524.18 ; 5524.47,4551.79 cw(c5502.27,4529.59) 5533.19,4524.18 ; 5524.47,4551.79 cw(c5502.27,4529.59) 5533.19,4524.18 ; 5524.47,4551.79 cw(c5502.27,4529.59) 5533.19,4524.18 ; 5524.47,4551.79 cw(c5502.27,4529.59) 5533.19,4524.18 ; 5524.47,4551.79 cw(c5502.27,4529.59) 5533.19,4524.18 ; 5524.47,4551.79 cw(c5502.27,4529.59) 5533.19,4524.18 ; 5524.47,4551.79 cw(c5502.27,4529.59) 5533.19,4524.18 ; 5524.47,4551.79 cw(c5502.27,4529.59) 5533.19,4524.18 ; 5524.47,4551.79 cw(c5502.27,4529.59) 5533.19,4524.18 ; 5524.47,4551.79 cw(c5502.27,4529.59) 5533.19,4524.18 ; 5524.47,4551.79 cw(c5502.27,4529.59) 5533.19,4524.18 ; 5524.47,4551.79 cw(c5502.27,4529.59) 5533.19,4524.18 ; 5524.47,4551.79 cw(c5502.27,4529.59) 5533.19,4524.18 ; 5524.47,4551.79 cw(c5502.27,4529.59) 5533.19,4524.18 ; 5524.47,4551.79 cw(c5502.27,4529.59) 5533.19,4524.18 ; 5524.47,4551.79 cw(c5502.27,4529.59) 5533.19,4524.18 ; 5524.47,4551.79 cw(c5502.27,4529.59) 5533.19,4524.18 ; 5524.47,4551.79 cw(c5502.27,4529.59) 5533.19,4524.18 ; 5524.47,4551.79 cw(c5502.27,4529.59) 5533.19,4524.18 ; 5524.47,4551.79 cw(c5502.27,4529.59) 5533.19,4524.18 ; 5524.47,4551.79 cw(c5502.27,4529.59) 5533.19,4524.18 ; 5524.47,4551.79 cw(c5502.27,4529.59) 5533.19,4524.18 ; 5524.47,4551.79 cw(c5502.27,4529.59) 5533.19,4524.18 ; 5524.47,4551.79 cw(c5502.27,4529.59) 5533.19,4524.18 ; 5524.47,4551.79 cw(c5502.27,4529.59) 5533.19,4524.18 ; 5524.47,4551.79 cw(c5502.27,4529.59) 5533.19,4524.18 ; 5524.47,4551.79 cw(c5502.27,4529.59) 5533.19,4524.18 ; 5524.47,4551.79 cw(c5502.27,4529.59) 5533.19,4524.18 ; 5524.47,4551.79 cw(c5502.27,4529.59) 5533.19,4524.18 ; 5524.47,4551.79 cw(c5502.27,4529.59) 5533.19,4524.18 ; 5524.47,4551.79 cw(c5502.27,4529.59) 5533.19,4524.18 ; 5524.47,4551.79 cw(c5502.27,4529.59) 5533.19,4524.18 ; 5524.47,4551.79 cw(c5502.27,4529.59) 5533.19,4524.18 ; 5524.47,4551.79 cw(c5502.27,4529.59) 5533.19,4524.18 ; 5524.47,4551.79 cw(c5502.27,4529.59) 5533.19,4524.18 ; 5524.47,4551.79 cw(c5502.27,4529.59) 5533.19,4524.18 ; 5524.47,4551.79 cw(c5502.27,4529.59) 5533.19,4524.18 ; 5524.47,4551.79 cw(c5502.27,4529.59) 5533.19,4524.18 ; 5524.47,4551.79 cw(c5502.27,4529.59) 5533.19,4524.18 ; 5524.47,4551.79 cw(c5502.27,4529.59) 5533.19,4524.18 ; 5524.47,4551.79 cw(c5502.27,4529.59) 5533.19,4524.18 ; 5524.47,4551.79 cw(c5502.27,4529.59) 5533.19,4524.18 ; 5524.47,4551.79 cw(c5502.27,4529.59) 5533.19,4524.18 ; 5524.47,4551.79 cw(c5502.27,4529.59) 5533.19,4524.18 ; 5524.47,4551.79 cw(c5502.27,4529.59) 5533.19,4524.18 ; 5524.47,4551.79 cw(c5502.27,4529.59) 5533.19,4524.18 ; 5524.47,4551.79 cw(c5502.27,4529.59) 5533.19,4524.18 ; 5524.47,4551.79 cw(c5502.27,4529.59) 5533.19,4524.18 ; 5524.47,4551.79 cw(c5502.27,4529.59) 5533.19,4524.18 ; 5524.47,4551.79 cw(c5502.27,4529.59) 5533.19,4524.18 ; 5524.47,4551.79 cw(c5502.27,4529.59) 5533.19,4524.18 ; 5524.47,4551.79 cw(c5502.27,4529.59) 5533.19,4524.18 ; 5524.47,4551.79 cw(c5502.27,4529.59) 5533.19,4524.18 ; 5524.47,4551.79 cw(c5502.27,4529.59) 5533.19,4524.18 ; 5524.47,4551.79 cw(c5502.27,4529.59) 5533.19,4524.18 ; 5524.47,4551.79 cw(c5502.27,4529.59) 5533.19,4524.18 ; 5524.47,4551.79 cw(c5502.27,4529.59) 5533.19,4524.18 ; 5524.47,4551.79 cw(c5502.27,4529.59) 5533.19,4524.18 ; 5524.47,4551.79 cw(c5502.27,4529.59) 5533.19,4524.18 ; 5524.47,4551.79 cw(c5502.27,4529.59) 5533.19,4524.18 ; 5524.47,4551.79 cw(c5502.27,4529.59) 5533.19,4524.18 ; 5524.47,4551.79 cw(c5502.27,4529.59) 5533.19,4524.18 ; 5524.47,4551.79 cw(c5502.27,4529.59) 5533.19,4524.18 ; 5524.47,4551.79 cw(c5502.27,4529.59) 5533.19,4524.18 ; 5524.47,4551.79 cw(c5502.27,4529.59) 5533.19,4524.18 ; 5524.47,4551.79 cw(c5502.27,4529.59) 5533.19,4524.18 ; 5524.47,4551.79 cw(c5502.27,4529.59) 5533.19,4524.18 ; 5524.47,4551.79 cw(c5502.27,4529.59) 5533.19,4524.18 ; 5524.47,4551.79 cw(c5502.27,4529.59) 5533.19,4524.18 ; 5524.47,4551.79 cw(c5502.27,4529.59) 5533.19,4524.18 ; 5524.47,4551.79 cw(c5502.27,4529.59) 5533.19,4524.18 ; 5524.47,4551.79 cw(c5502.27,4529.59) 5533.19,4524.18 ; 5524.47,4551.79 cw(c5502.27,4529.59) 5533.19,4524.18 ; 5524.47,4551.79 cw(c5502.27,4529.59) 5533.19,4524.18 ; 5524.47,4551.79 cw(c5502.27,4529.59) 5533.19,4524.18 ; 5524.47,4551.79 cw(c5502.27,4529.59) 5533.19,4524.18 ; 5524.47,4551.79 cw(c5502.27,4529.59) 5533.19,4524.18 ; 5524.47,4551.79 cw(c5502.27,4529.59) 5533.19,4524.18 ; 5524.47,4551.79 cw(c5502.27,4529.59) 5533.19,4524.18 ; 5524.47,4551.79 cw(c5502.27,4529.59) 5533.19,4524.18 ; 5524.47,4551.79 cw(c5502.27,4529.59) 5533.19,4524.18 ; 5524.47,4551.79 cw(c5502.27,4529.59) 5533.19,4524.18 ; 5524.47,4551.79 cw(c5502.27,4529.59) 5533.19,4524.18 ; 5524.47,4551.79 cw(c5502.27,4529.59) 5533.19,4524.18 ; 5524.47,4551.79 cw(c5502.27,4529.59) 5533.19,4524.18 ; 5524.47,4551.79 cw(c5502.27,4529.59) 5533.19,4524.18 ; 5524.47,4551.79 cw(c5502.27,4529.59) 5533.19,4524.18 ; 5524.47,4551.79 cw(c5502.27,4529.59) 5533.19,4524.18 ; 5524.47,4551.79 cw(c5502.27,4529.59) 5533.19,4524.18 ; 5524.47,4551.79 cw(c5502.27,4529.59) 5533.19,4524.18 ; 5524.47,4551.79 cw(c5502.27,4529.59) 5533.19,4524.18 ; 5524.47,4551.79 cw(c5502.27,4529.59) 5533.19,4524.18 ; 5524.47,4551.79 cw(c5502.27,4529.59) 5533.19,4524.18 ; 5524.47,4551.79 cw(c5502.27,4529.59) 5533.19,4524.18 ; 5524.47,4551.79 cw(c5502.27,4529.59) 5533.19,4524.18 ; 5524.47,4551.79 cw(c5502.27,4529.59) 5533.19,4524.18 ; 5524.47,4551.79 cw(c5502.27,4529.59) 5533.19,4524.18 ; 5524.47,4551.79 cw(c5502.27,4529.59) 5533.19,4524.18 ; 5524.47,4551.79 cw(c5502.27,4529.59) 5533.19,4524.18 ; 5524.47,4551.79 cw(c5502.27,4529.59) 5533.19,4524.18 ; 5524.47,4551.79 cw(c5502.27,4529.59) 5533.19,4524.18 ; 5524.47,4551.79 cw(c5502.27,4529.59) 5533.19,4524.18 ; 5524.47,4551.79 cw(c5502.27,4529.59) 5533.19,4524.18 ; 5524.47,4551.79 cw(c5502.27,4529.59) 5533.19,4524.18 ; 5524.47,4551.79 cw(c5502.27,4529.59) 5533.19,4524.18 ; 5524.47,4551.79 cw(c5502.27,4529.59) 5533.19,4524.18 ; 5524.47,4551.79 cw(c5502.27,4529.59) 5533.19,4524.18 ; 5524.47,4551.79 cw(c5502.27,4529.59) 5533.19,4524.18 ; 5524.47,4551.79 cw(c5502.27,4529.59) 5533.19,4524.18 ; 5524.47,4551.79 cw(c5502.27,4529.59) 5533.19,4524.18 ; 5524.47,4551.79 cw(c5502.27,4529.59) 5533.19,4524.18 ; 5524.47,4551.79 cw(c5502.27,4529.59) 5533.19,4524.18 ; 5524.47,4551.79 cw(c5502.27,4529.59) 5533.19,4524.18 ; 5524.47,4551.79 cw(c5502.27,4529.59) 5533.19,4524.18 ; 5524.47,4551.79 cw(c5502.27,4529.59) 5533.19,4524.18 ; 5524.47,4551.79 cw(c5502.27,4529.59) 5533.19,4524.18 ; 5524.47,4551.79 cw(c5502.27,4529.59) 5533.19,4524.18 ; 5524.47,4551.79 cw(c5502.27,4529.59) 5533.19,4524.18 ; 5524.47,4551.79 cw(c5502.27,4529.59) 5533.19,4524.18 ; 5524.47,4551.79 cw(c5502.27,4529.59) 5533.19,4524.18 ; 5524.47,4551.79 cw(c5502.27,4529.59) 5533.19,4524.18 ; 5524.47,4551.79 cw(c5502.27,4529.59) 5533.19,4524.18 ; 5524.47,4551.79 cw(c5502.27,4529.59) 5533.19,4524.18 ; 5524.47,4551.79 cw(c5502.27,4529.59) 5533.19,4524.18 ; 5524.47,4551.79 cw(c5502.27,4529.59) 5533.19,4524.18 ; 5524.47,4551.79 cw(c5502.27,4529.59) 5533.19,4524.18 ; 5524.47,4551.79 cw(c5502.27,4529.59) 5533.19,4524.18 ; 5524.47,4551.79 cw(c5502.27,4529.59) 5533.19,4524.18 ; 5524.47,4551.79 cw(c5502.27,4529.59) 5533.19,4524.18 ; 5524.47,4551.79 cw(c5502.27,4529.59) 5533.19,4524.18 ; 5524.47,4551.79 cw(c5502.27,4529.59) 5533.19,4524.18 ; 5524.47,4551.79 cw(c5502.27,4529.59) 5533.19,4524.18 ; 5524.47,4551.79 cw(c5502.27,4529.59) 5533.19,4524.18 ; 5524.47,4551.79 cw(c5502.27,4529.59) 5533.19,4524.18 ; 5524.47,4551.79 cw(c5502.27,4529.59) 5533.19,4524.18 ; 5524.47,4551.79 cw(c5502.27,4529.59) 5533.19,4524.18 ; 5524.47,4551.79 cw(c5502.27,4529.59) 5533.19,4524.18 ; 5524.47,4551.79 cw(c5502.27,4529.59) 5533.19,4524.18 ; 5524.47,4551.79 cw(c5502.27,4529.59) 5533.19,4524.18 ; 5524.47,4551.79 cw(c5502.27,4529.59) 5533.19,4524.18 ; 5524.47,4551.79 cw(c5502.27,4529.59) 5533.19,4524.18 ; 5524.47,4551.79 cw(c5502.27,4529.59) 5533.19,4524.18 ; 5524.47,4551.79 cw(c5502.27,4529.59) 5533.19,4524.18 ; 5524.47,4551.79 cw(c5502.27,4529.59) 5533.19,4524.18 ; 5524.47,4551.79 cw(c5502.27,4529.59) 5533.19,4524.18 ; 5524.47,4551.79 cw(c5502.27,4529.59) 5533.19,4524.18 ; 5524.47,4551.79 cw(c5502.27,4529.59) 5533.19,4524.18 ; 5524.47,4551.79 cw(c5502.27,4529.59) 5533.19,4524.18 ; 5524.47,4551.79 cw(c5502.27,4529.59) 5533.19,4524.18 ; 5524.47,4551.79 cw(c5502.27,4529.59) 5533.19,4524.18 ; 5524.47,4551.79 cw(c5502.27,4529.59) 5533.19,4524.18 ; 5524.47,4551.79 cw(c5502.27,4529.59) 5533.19,4524.18 ; 5524.47,4551.79 cw(c5502.27,4529.59) 5533.19,4524.18 ; 5524.47,4551.79 cw(c5502.27,4529.59) 5533.19,4524.18 ; 5524.47,4551.79 cw(c5502.27,4529.59) 5533.19,4524.18 ; 5524.47,4551.79 cw(c5502.27,4529.59) 5533.19,4524.18 ; 5524.47,4551.79 cw(c5502.27,4529.59) 5533.19,4524.18 ; 5524.47,4551.79 cw(c5502.27,4529.59) 5533.19,4524.18 ; 5524.47,4551.79 cw(c5502.27,4529.59) 5533.19,4524.18 ; 5524.47,4551.79 cw(c5502.27,4529.59) 5533.19,4524.18 ; 5524.47,4551.79 cw(c5502.27,4529.59) 5533.19,4524.18 ; 5524.47,4551.79 cw(c5502.27,4529.59) 5533.19,4524.18 ; 5524.47,4551.79 cw(c5502.27,4529.59) 5533.19,4524.18 ; 5524.47,4551.79 cw(c5502.27,4529.59) 5533.19,4524.18 ; 5524.47,4551.79 cw(c5502.27,4529.59) 5533.19,4524.18 ; 5524.47,4551.79 cw(c5502.27,4529.59) 5533.19,4524.18 ; 5524.47,4551.79 cw(c5502.27,4529.59) 5533.19,4524.18 ; 5524.47,4551.79 cw(c5502.27,4529.59) 5533.19,4524.18 ; 5524.47,4551.79 cw(c5502.27,4529.59) 5533.19,4524.18 ; 5524.47,4551.79 cw(c5502.27,4529.59) 5533.19,4524.18 ; 5524.47,4551.79 cw(c5502.27,4529.59) 5533.19,4524.18 ; 5524.47,4551.79 cw(c5502.27,4529.59) 5533.19,4524.18 ; 5524.47,4551.79 cw(c5502.27,4529.59) 5533.19,4524.18 ; 5524.47,4551.79 cw(c5502.27,4529.59) 5533.19,4524.18 ; 5524.47,4551.79 cw(c5502.27,4529.59) 5533.19,4524.18 ; 5524.47,4551.79 cw(c5502.27,4529.59) 5533.19,4524.18 ; 5524.47,4551.79 cw(c5502.27,4529.59) 5533.19,4524.18 ; 5524.47,4551.79 cw(c5502.27,4529.59) 5533.19,4524.18 ; 5524.47,4551.79 cw(c5502.27,4529.59) 5533.19,4524.18 ; 5524.47,4551.79 cw(c5502.27,4529.59) 5533.19,4524.18 ; 5524.47,4551.79 cw(c5502.27,4529.59) 5533.19,4524.18 ; 5524.47,4551.79 cw(c5502.27,4529.59) 5533.19,4524.18 ; 5524.47,4551.79 cw(c5502.27,4529.59) 5533.19,4524.18 ; 5524.47,4551.79 cw(c5502.27,4529.59) 5533.19,4524.18 ; 5524.47,4551.79 cw(c5502.27,4529.59) 5533.19,4524.18 ; 5524.47,4551.79 cw(c5502.27,4529.59) 5533.19,4524.18 ; 5524.47,4551.79 cw(c5502.27,4529.59) 5533.19,4524.18 ; 5524.47,4551.79 cw(c5502.27,4529.59) 5533.19,4524.18 ; 5524.47,4551.79 cw(c5502.27,4529.59) 5533.19,4524.18 ; 5524.47,4551.79 cw(c5502.27,4529.59) 5533.19,4524.18 ; 5524.47,4551.79 cw(c5502.27,4529.59) 5533.19,4524.18 ; 5524.47,4551.79 cw(c5502.27,4529.59) 5533.19,4524.18 ; 5524.47,4551.79 cw(c5502.27,4529.59) 5533.19,4524.18 ; 5524.47,4551.79 cw(c5502.27,4529.59) 5533.19,4524.18 ; 5524.47,4551.79 cw(c5502.27,4529.59) 5533.19,4524.18 ; 5524.47,4551.79 cw(c5502.27,4529.59) 5533.19,4524.18 ; 5524.47,4551.79 cw(c5502.27,4529.59) 5533.19,4524.18 ; 5524.47,4551.79 cw(c5502.27,4529.59) 5533.19,4524.18 ; 5524.47,4551.79 cw(c5502.27,4529.59) 5533.19,4524.18 ; 5524.47,4551.79 cw(c5502.27,4529.59) 5533.19,4524.18 ; 5524.47,4551.79 cw(c5502.27,4529.59) 5533.19,4524.18 ; 5524.47,4551.79 cw(c5502.27,4529.59) 5533.19,4524.18 ; 5524.47,4551.79 cw(c5502.27,4529.59) 5533.19,4524.18 ; 5524.47,4551.79 cw(c5502.27,4529.59) 5533.19,4524.18 ; 5524.47,4551.79 cw(c5502.27,4529.59) 5533.19,4524.18 ; 5524.47,4551.79 cw(c5502.27,4529.59) 5533.19,4524.18 ; 5524.47,4551.79 cw(c5502.27,4529.59) 5533.19,4524.18 ; 5524.47,4551.79 cw(c5502.27,4529.59) 5533.19,4524.18 ; 5524.47,4551.79 cw(c5502.27,4529.59) 5533.19,4524.18 ; 5524.47,4551.79 cw(c5502.27,4529.59) 5533.19,4524.18 ; 5524.47,4551.79 cw(c5502.27,4529.59) 5533.19,4524.18 ; 5524.47,4551.79 cw(c5502.27,4529.59) 5533.19,4524.18 ; 5524.47,4551.79 cw(c5502.27,4529.59) 5533.19,4524.18 ; 5524.47,4551.79 cw(c5502.27,4529.59) 5533.19,4524.18 ; 5524.47,4551.79 cw(c5502.27,4529.59) 5533.19,4524.18 ; 5524.47,4551.79 cw(c5502.27,4529.59) 5533.19,4524.18 ; 5524.47,4551.79 cw(c5502.27,4529.59) 5533.19,4524.18 ; 5524.47,4551.79 cw(c5502.27,4529.59) 5533.19,4524.18 ; 5524.47,4551.79 cw(c5502.27,4529.59) 5533.19,4524.18 ; 5524.47,4551.79 cw(c5502.27,4529.59) 5533.19,4524.18 ; 5524.47,4551.79 cw(c5502.27,4529.59) 5533.19,4524.18 ; 5524.47,4551.79 cw(c5502.27,4529.59) 5533.19,4524.18 ; 5524.47,4551.79 cw(c5502.27,4529.59) 5533.19,4524.18 ; 5524.47,4551.79 cw(c5502.27,4529.59) 5533.19,4524.18 ; 5524.47,4551.79 cw(c5502.27,4529.59) 5533.19,4524.18 ; 5524.47,4551.79 cw(c5502.27,4529.59) 5533.19,4524.18 ; 5524.47,4551.79 cw(c5502.27,4529.59) 5533.19,4524.18 ; 5524.47,4551.79 cw(c5502.27,4529.59) 5533.19,4524.18 ; 5524.47,4551.79 cw(c5502.27,4529.59) 5533.19,4524.18 ; 5524.47,4551.79 cw(c5502.27,4529.59) 5533.19,4524.18 ; 5524.47,4551.79 cw(c5502.27,4529.59) 5533.19,4524.18 ; 5524.47,4551.79 cw(c5502.27,4529.59) 5533.19,4524.18 ; 5524.47,4551.79 cw(c5502.27,4529.59) 5533.19,4524.18 ; 5524.47,4551.79 cw(c5502.27,4529.59) 5533.19,4524.18 ; 5524.47,4551.79 cw(c5502.27,4529.59) 5533.19,4524.18 ; 5524.47,4551.79 cw(c5502.27,4529.59) 5533.19,4524.18 ; 5524.47,4551.79 cw(c5502.27,4529.59) 5533.19,4524.18 ; 5524.47,4551.79 cw(c5502.27,4529.59) 5533.19,4524.18 ; 5524.47,4551.79 cw(c5502.27,4529.59) 5533.19,4524.18 ; 5524.47,4551.79 cw(c5502.27,4529.59) 5533.19,4524.18 ; 5524.47,4551.79 cw(c5502.27,4529.59) 5533.19,4524.18 ; 5524.47,4551.79 cw(c5502.27,4529.59) 5533.19,4524.18 ; 5524.47,4551.79 cw(c5502.27,4529.59) 5533.19,4524.18 ; 5524.47,4551.79 cw(c5502.27,4529.59) 5533.19,4524.18 ; 5524.47,4551.79 cw(c5502.27,4529.59) 5533.19,4524.18 ; 5524.47,4551.79 cw(c5502.27,4529.59) 5533.19,4524.18 ; 5524.47,4551.79 cw(c5502.27,4529.59) 5533.19,4524.18 ; 5524.47,4551.79 cw(c5502.27,4529.59) 5533.19,4524.18 ; 5524.47,4551.79 cw(c5502.27,4529.59) 5533.19,4524.18 ; 5524.47,4551.79 cw(c5502.27,4529.59) 5533.19,4524.18 ; 5524.47,4551.79 cw(c5502.27,4529.59) 5533.19,4524.18 ; 5524.47,4551.79 cw(c5502.27,4529.59) 5533.19,4524.18 ; 5524.47,4551.79 cw(c5502.27,4529.59) 5533.19,4524.18 ; 5524.47,4551.79 cw(c5502.27,4529.59) 5533.19,4524.18 ; 5524.47,4551.79 cw(c5502.27,4529.59) 5533.19,4524.18 ; 5524.47,4551.79 cw(c5502.27,4529.59) 5533.19,4524.18 ; 5524.47,4551.79 cw(c5502.27,4529.59) 5533.19,4524.18 ; 5524.47,4551.79 cw(c5502.27,4529.59) 5533.19,4524.18 ; 5524.47,4551.79 cw(c5502.27,4529.59) 5533.19,4524.18 ; 5524.47,4551.79 cw(c5502.27,4529.59) 5533.19,4524.18 ; 5524.47,4551.79 cw(c5502.27,4529.59) 5533.19,4524.18 ; 5524.47,4551.79 cw(c5502.27,4529.59) 5533.19,4524.18 ; 5524.47,4551.79 cw(c5502.27,4529.59) 5533.19,4524.18 ; 5524.47,4551.79 cw(c5502.27,4529.59) 5533.19,4524.18 ; 5524.47,4551.79 cw(c5502.27,4529.59) 5533.19,4524.18 ; 5524.47,4551.79 cw(c5502.27,4529.59) 5533.19,4524.18 ; 5524.47,4551.79 cw(c5502.27,4529.59) 5533.19,4524.18 ; 5524.47,4551.79 cw(c5502.27,4529.59) 5533.19,4524.18 ; 5524.47,4551.79 cw(c5502.27,4529.59) 5533.19,4524.18 ; 5524.47,4551.79 cw(c5502.27,4529.59) 5533.19,4524.18 ; 5524.47,4551.79 cw(c5502.27,4529.59) 5533.19,4524.18 ; 5524.47,4551.79 cw(c5502.27,4529.59) 5533.19,4524.18 ; 5524.47,4551.79 cw(c5502.27,4529.59) 5533.19,4524.18 ; 5524.47,4551.79 cw(c5502.27,4529.59) 5533.19,4524.18 ; 5524.47,4551.79 cw(c5502.27,4529.59) 5533.19,4524.18 ; 5524.47,4551.79 cw(c5502.27,4529.59) 5533.19,4524.18 ; 5524.47,4551.79 cw(c5502.27,4529.59) 5533.19,4524.18 ; 5524.47,4551.79 cw(c5502.27,4529.59) 5533.19,4524.18 ; 5524.47,4551.79 cw(c5502.27,4529.59) 5533.19,4524.18 ; 5524.47,4551.79 cw(c5502.27,4529.59) 5533.19,4524.18 ; 5524.47,4551.79 cw(c5502.27,4529.59) 5533.19,4524.18 ; 5524.47,4551.79 cw(c5502.27,4529.59) 5533.19,4524.18 ; 5524.47,4551.79 cw(c5502.27,4529.59) 5533.19,4524.18 ; 5524.47,4551.79 cw(c5502.27,4529.59) 5533.19,4524.18 ; 5524.47,4551.79 cw(c5502.27,4529.59) 5533.19,4524.18 ; 5524.47,4551.79 cw(c5502.27,4529.59) 5533.19,4524.18 ; 5524.47,4551.79 cw(c5502.27,4529.59) 5533.19,4524.18 ; 5524.47,4551.79 cw(c5502.27,4529.59) 5533.19,4524.18 ; 5524.47,4551.79 cw(c5502.27,4529.59) 5533.19,4524.18 ; 5524.47,4551.79 cw(c5502.27,4529.59) 5533.19,4524.18 ; 5524.47,4551.79 cw(c5502.27,4529.59) 5533.19,4524.18 ; 5524.47,4551.79 cw(c5502.27,4529.59) 5533.19,4524.18 ; 5524.47,4551.79 cw(c5502.27,4529.59) 5533.19,4524.18 ; 5524.47,4551.79 cw(c5502.27,4529.59) 5533.19,4524.18 ; 5524.47,4551.79 cw(c5502.27,4529.59) 5533.19,4524.18 ; 5524.47,4551.79 cw(c5502.27,4529.59) 5533.19,4524.18 ; 5524.47,4551.79 cw(c5502.27,4529.59) 5533.19,4524.18 ; 5524.47,4551.79 cw(c5502.27,4529.59) 5533.19,4524.18 ; 5524.47,4551.79 cw(c5502.27,4529.59) 5533.19,4524.18 ; 5524.47,4551.79 cw(c5502.27,4529.59) 5533.19,4524.18 ; 5524.47,4551.79 cw(c5502.27,4529.59) 5533.19,4524.18 ; 5524.47,4551.79 cw(c5502.27,4529.59) 5533.19,4524.18 ; 5524.47,4551.79 cw(c5502.27,4529.59) 5533.19,4524.18 ; 5524.47,4551.79 cw(c5502.27,4529.59) 5533.19,4524.18 ; 5524.47,4551.79 cw(c5502.27,4529.59) 5533.19,4524.18 ; 5524.47,4551.79 cw(c5502.27,4529.59) 5533.19,4524.18 ; 5524.47,4551.79 cw(c5502.27,4529.59) 5533.19,4524.18 ; 5524.47,4551.79 cw(c5502.27,4529.59) 5533.19,4524.18 ; 5524.47,4551.79 cw(c5502.27,4529.59) 5533.19,4524.18 ; 5524.47,4551.79 cw(c5502.27,4529.59) 5533.19,4524.18 ; 5524.47,4551.79 cw(c5502.27,4529.59) 5533.19,4524.18 ; 5524.47,4551.79 cw(c5502.27,4529.59) 5533.19,4524.18 ; 5524.47,4551.79 cw(c5502.27,4529.59) 5533.19,4524.18 ; 5524.47,4551.79 cw(c5502.27,4529.59) 5533.19,4524.18 ; 5524.47,4551.79 cw(c5502.27,4529.59) 5533.19,4524.18 ; 5524.47,4551.79 cw(c5502.27,4529.59) 5533.19,4524.18 ; 5524.47,4551.79 cw(c5502.27,4529.59) 5533.19,4524.18 ; 5524.47,4551.79 cw(c5502.27,4529.59) 5533.19,4524.18 ; 5524.47,4551.79 cw(c5502.27,4529.59) 5533.19,4524.18 ; 5524.47,4551.79 cw(c5502.27,4529.59) 5533.19,4524.18 ; 5524.47,4551.79 cw(c5502.27,4529.59) 5533.19,4524.18 ; 5524.47,4551.79 cw(c5502.27,4529.59) 5533.19,4524.18 ; 5524.47,4551.79 cw(c5502.27,4529.59) 5533.19,4524.18 ; 5524.47,4551.79 cw(c5502.27,4529.59) 5533.19,4524.18 ; 5524.47,4551.79 cw(c5502.27,4529.59) 5533.19,4524.18 ; 5524.47,4551.79 cw(c5502.27,4529.59) 5533.19,4524.18 ; 5524.47,4551.79 cw(c5502.27,4529.59) 5533.19,4524.18 ; 5524.47,4551.79 cw(c5502.27,4529.59) 5533.19,4524.18 ; 5524.47,4551.79 cw(c5502.27,4529.59) 5533.19,4524.18 ; 5524.47,4551.79 cw(c5502.27,4529.59) 5533.19,4524.18 ; 5524.47,4551.79 cw(c5502.27,4529.59) 5533.19,4524.18 ; 5524.47,4551.79 cw(c5502.27,4529.59) 5533.19,4524.18 ; 5524.47,4551.79 cw(c5502.27,4529.59) 5533.19,4524.18 ; 5524.47,4551.79 cw(c5502.27,4529.59) 5533.19,4524.18 ; 5524.47,4551.79 cw(c5502.27,4529.59) 5533.19,4524.18 ; 5524.47,4551.79 cw(c5502.27,4529.59) 5533.19,4524.18 ; 5524.47,4551.79 cw(c5502.27,4529.59) 5533.19,4524.18 ; 5524.47,4551.79 cw(c5502.27,4529.59) 5533.19,4524.18 ; 5524.47,4551.79 cw(c5502.27,4529.59) 5533.19,4524.18 ; 5524.47,4551.79 cw(c5502.27,4529.59) 5533.19,4524.18 ; 5524.47,4551.79 cw(c5502.27,4529.59) 5533.19,4524.18 ; 5524.47,4551.79 cw(c5502.27,4529.59) 5533.19,4524.18 ; 5524.47,4551.79 cw(c5502.27,4529.59) 5533.19,4524.18 ; 5524.47,4551.79 cw(c5502.27,4529.59) 5533.19,4524.18 ; 5524.47,4551.79 cw(c5502.27,4529.59) 5533.19,4524.18 ; 5524.47,4551.79 cw(c5502.27,4529.59) 5533.19,4524.18 ; 5524.47,4551.79 cw(c5502.27,4529.59) 5533.19,4524.18 ; 5524.47,4551.79 cw(c5502.27,4529.59) 5533.19,4524.18 ; 5524.47,4551.79 cw(c5502.27,4529.59) 5533.19,4524.18 ; 5524.47,4551.79 cw(c5502.27,4529.59) 5533.19,4524.18 ; 5524.47,4551.79 cw(c5502.27,4529.59) 5533.19,4524.18 ; 5524.47,4551.79 cw(c5502.27,4529.59) 5533.19,4524.18 ; 5524.47,4551.79 cw(c5502.27,4529.59) 5533.19,4524.18 ; 5524.47,4551.79 cw(c5502.27,4529.59) 5533.19,4524.18 ; 5524.47,4551.79 cw(c5502.27,4529.59) 5533.19,4524.18 ; 5524.47,4551.79 cw(c5502.27,4529.59) 5533.19,4524.18 ; 5524.47,4551.79 cw(c5502.27,4529.59) 5533.19,4524.18 ; 5524.47,4551.79 cw(c5502.27,4529.59) 5533.19,4524.18 ; 5524.47,4551.79 cw(c5502.27,4529.59) 5533.19,4524.18 ; 5524.47,4551.79 cw(c5502.27,4529.59) 5533.19,4524.18 ; 5524.47,4551.79 cw(c5502.27,4529.59) 5533.19,4524.18 ; 5524.47,4551.79 cw(c5502.27,4529.59) 5533.19,4524.18 ; 5524.47,4551.79 cw(c5502.27,4529.59) 5533.19,4524.18 ; 5524.47,4551.79 cw(c5502.27,4529.59) 5533.19,4524.18 ; 5524.47,4551.79 cw(c5502.27,4529.59) 5533.19,4524.18 ; 5524.47,4551.79 cw(c5502.27,4529.59) 5533.19,4524.18 ; 5524.47,4551.79 cw(c5502.27,4529.59) 5533.19,4524.18 ; 5524.47,4551.79 cw(c5502.27,4529.59) 5533.19,4524.18 ; 5524.47,4551.79 cw(c5502.27,4529.59) 5533.19,4524.18 ; 5524.47,4551.79 cw(c5502.27,4529.59) 5533.19,4524.18 ; 5524.47,4551.79 cw(c5502.27,4529.59) 5533.19,4524.18 ; 5524.47,4551.79 cw(c5502.27,4529.59) 5533.19,4524.18 ; 5524.47,4551.79 cw(c5502.27,4529.59) 5533.19,4524.18 ; 5524.47,4551.79 cw(c5502.27,4529.59) 5533.19,4524.18 ; 5524.47,4551.79 cw(c5502.27,4529.59) 5533.19,4524.18 ; 5524.47,4551.79 cw(c5502.27,4529.59) 5533.19,4524.18 ; 5524.47,4551.79 cw(c5502.27,4529.59) 5533.19,4524.18 ; 5524.47,4551.79 cw(c5502.27,4529.59) 5533.19,4524.18 ; 5524.47,4551.79 cw(c5502.27,4529.59) 5533.19,4524.18 ; 5524.47,4551.79 cw(c5502.27,4529.59) 5533.19,4524.18 ; 5524.47,4551.79 cw(c5502.27,4529.59) 5533.19,4524.18 ; 5524.47,4551.79 cw(c5502.27,4529.59) 5533.19,4524.18 ; 5524.47,4551.79 cw(c5502.27,4529.59) 5533.19,4524.18 ; 5524.47,4551.79 cw(c5502.27,4529.59) 5533.19,4524.18 ; 5524.47,4551.79 cw(c5502.27,4529.59) 5533.19,4524.18 ; 5524.47,4551.79 cw(c5502.27,4529.59) 5533.19,4524.18 ; 5524.47,4551.79 cw(c5502.27,4529.59) 5533.19,4524.18 ; 5524.47,4551.79 cw(c5502.27,4529.59) 5533.19,4524.18 ; 5524.47,4551.79 cw(c5502.27,4529.59) 5533.19,4524.18 ; 5524.47,4551.79 cw(c5502.27,4529.59) 5533.19,4524.18 ; 5524.47,4551.79 cw(c5502.27,4529.59) 5533.19,4524.18 ; 5524.47,4551.79 cw(c5502.27,4529.59) 5533.19,4524.18 ; 5524.47,4551.79 cw(c5502.27,4529.59) 5533.19,4524.18 ; 5524.47,4551.79 cw(c5502.27,4529.59) 5533.19,4524.18 ; 5524.47,4551.79 cw(c5502.27,4529.59) 5533.19,4524.18 ; 5524.47,4551.79 cw(c5502.27,4529.59) 5533.19,4524.18 ; 5524.47,4551.79 cw(c5502.27,4529.59) 5533.19,4524.18 ; 5524.47,4551.79 cw(c5502.27,4529.59) 5533.19,4524.18 ; 5524.47,4551.79 cw(c5502.27,4529.59) 5533.19,4524.18 ; 5524.47,4551.79 cw(c5502.27,4529.59) 5533.19,4524.18 ; 5524.47,4551.79 cw(c5502.27,4529.59) 5533.19,4524.18 ; 5524.47,4551.79 cw(c5502.27,4529.59) 5533.19,4524.18 ; 5524.47,4551.79 cw(c5502.27,4529.59) 5533.19,4524.18 ; 5524.47,4551.79 cw(c5502.27,4529.59) 5533.19,4524.18 ; 5524.47,4551.79 cw(c5502.27,4529.59) 5533.19,4524.18 ; 5524.47,4551.79 cw(c5502.27,4529.59) 5533.19,4524.18 ; 5524.47,4551.79 cw(c5502.27,4529.59) 5533.19,4524.18 ; 5524.47,4551.79 cw(c5502.27,4529.59) 5533.19,4524.18 ; 5524.47,4551.79 cw(c5502.27,4529.59) 5533.19,4524.18 ; 5524.47,4551.79 cw(c5502.27,4529.59) 5533.19,4524.18 ; 5524.47,4551.79 cw(c5502.27,4529.59) 5533.19,4524.18 ; 5524.47,4551.79 cw(c5502.27,4529.59) 5533.19,4524.18 ; 5524.47,4551.79 cw(c5502.27,4529.59) 5533.19,4524.18 ; 5524.47,4551.79 cw(c5502.27,4529.59) 5533.19,4524.18 ; 5524.47,4551.79 cw(c5502.27,4529.59) 5533.19,4524.18 ; 5524.47,4551.79 cw(c5502.27,4529.59) 5533.19,4524.18 ; 5524.47,4551.79 cw(c5502.27,4529.59) 5533.19,4524.18 ; 5524.47,4551.79 cw(c5502.27,4529.59) 5533.19,4524.18 ; 5524.47,4551.79 cw(c5502.27,4529.59) 5533.19,4524.18 ; 5524.47,4551.79 cw(c5502.27,4529.59) 5533.19,4524.18 ; 5524.47,4551.79 cw(c5502.27,4529.59) 5533.19,4524.18 ; 5524.47,4551.79 cw(c5502.27,4529.59) 5533.19,4524.18 ; 5524.47,4551.79 cw(c5502.27,4529.59) 5533.19,4524.18 ; 5524.47,4551.79 cw(c5502.27,4529.59) 5533.19,4524.18 ; 5524.47,4551.79 cw(c5502.27,4529.59) 5533.19,4524.18 ; 5524.47,4551.79 cw(c5502.27,4529.59) 5533.19,4524.18 ; 5524.47,4551.79 cw(c5502.27,4529.59) 5533.19,4524.18 ; 5524.47,4551.79 cw(c5502.27,4529.59) 5533.19,4524.18 ; 5524.47,4551.79 cw(c5502.27,4529.59) 5533.19,4524.18 ; 5524.47,4551.79 cw(c5502.27,4529.59) 5533.19,4524.18 ; 5524.47,4551.79 cw(c5502.27,4529.59) 5533.19,4524.18 ; 5524.47,4551.79 cw(c5502.27,4529.59) 5533.19,4524.18 ; 5524.47,4551.79 cw(c5502.27,4529.59) 5533.19,4524.18 ; 5524.47,4551.79 cw(c5502.27,4529.59) 5533.19,4524.18 ; 5524.47,4551.79 cw(c5502.27,4529.59) 5533.19,4524.18 ; 5524.47,4551.79 cw(c5502.27,4529.59) 5533.19,4524.18 ; 5524.47,4551.79 cw(c5502.27,4529.59) 5533.19,4524.18 ; 5524.47,4551.79 cw(c5502.27,4529.59) 5533.19,4524.18 ; 5524.47,4551.79 cw(c5502.27,4529.59) 5533.19,4524.18 ; 5524.47,4551.79 cw(c5502.27,4529.59) 5533.19,4524.18 ; 5524.47,4551.79 cw(c5502.27,4529.59) 5533.19,4524.18 ; 5524.47,4551.79 cw(c5502.27,4529.59) 5533.19,4524.18